# Altium PCB BoostconverterLast.PcbDoc
Units mm, origin at the board's own origin, x right, y up, seen from the top; angles counter-clockwise.
Board outline 25.4 x 57.15 mm, 2 copper layers (Top Layer, Bottom Layer); 33 components, 21 nets, 100 pads, 32 vias.
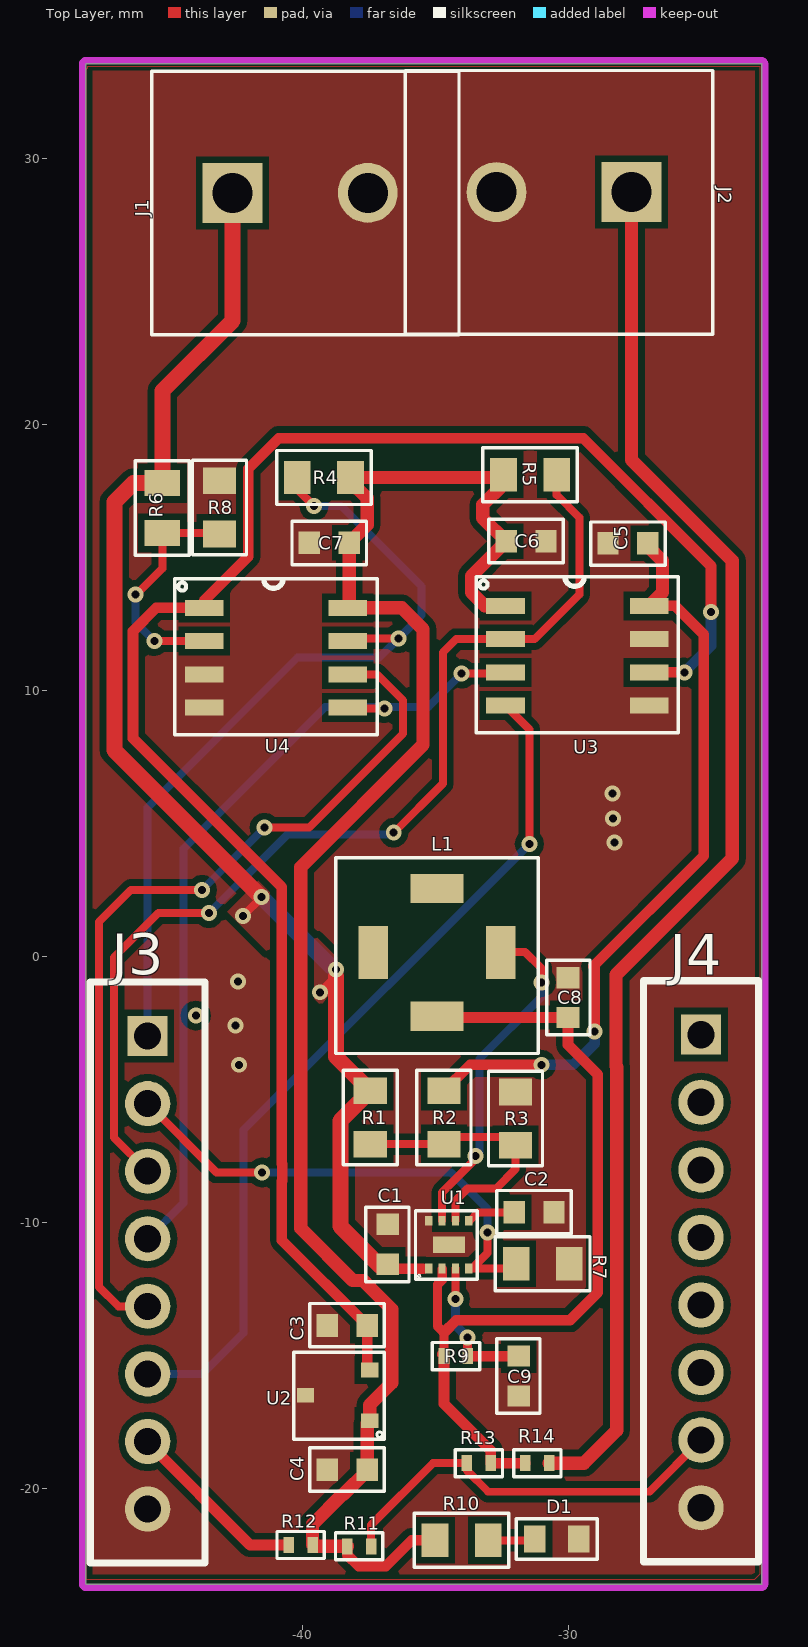
[diagram p0: Top Layer view]
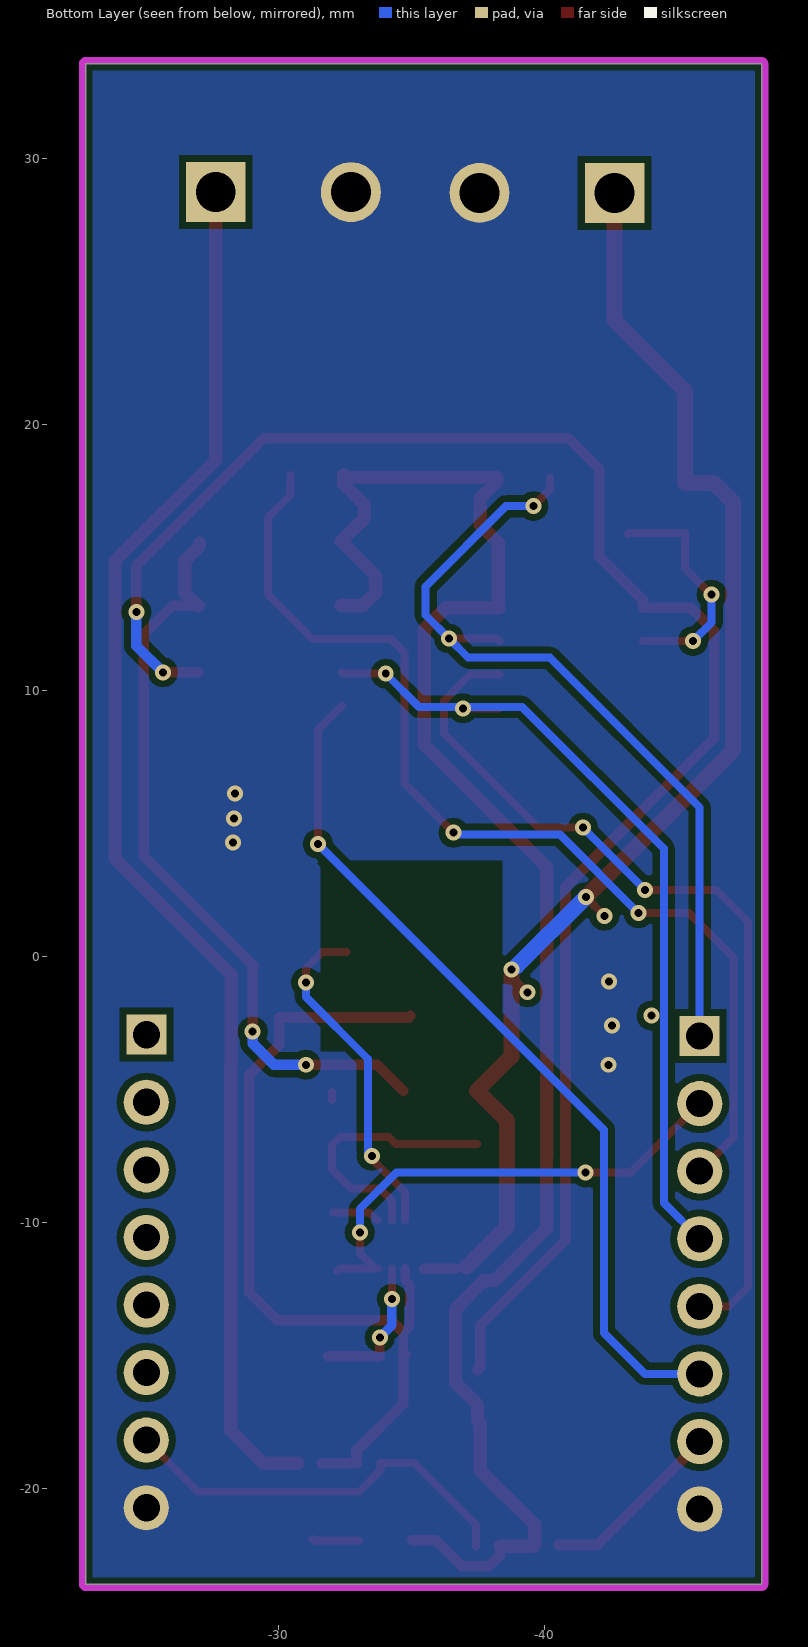
[diagram p1: Bottom Layer view, seen from below]
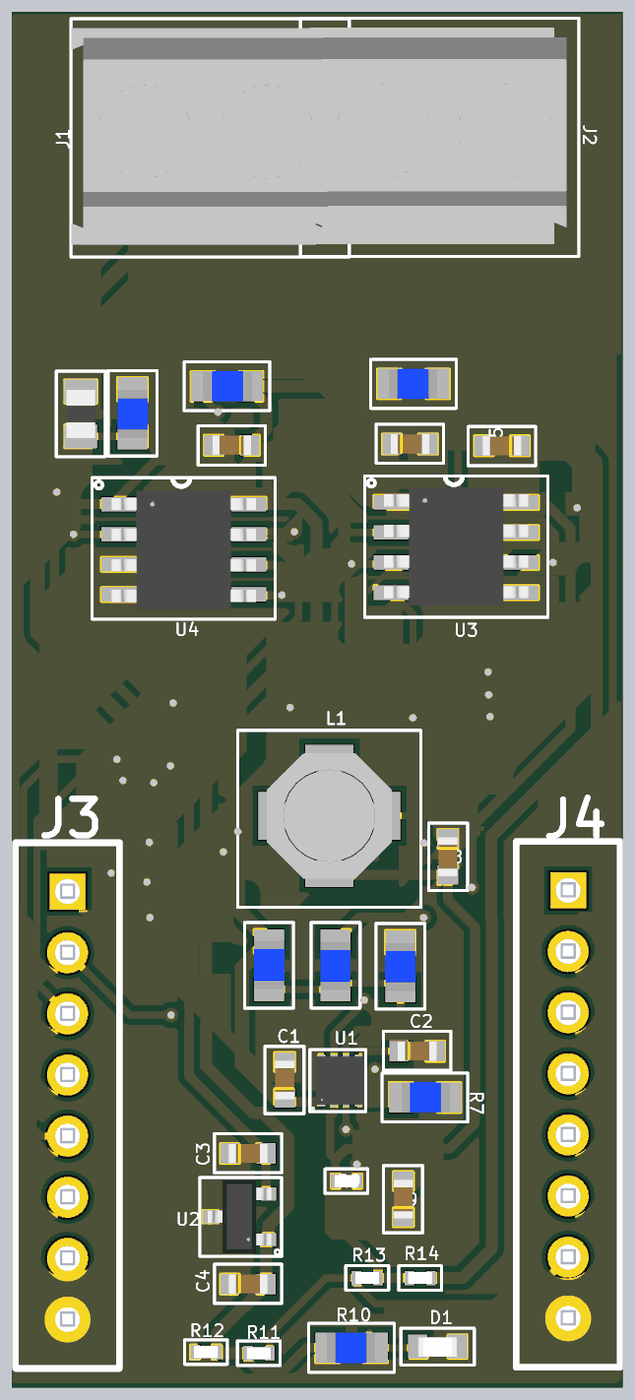
[diagram p2: 3D render of the assembled board from above, using the file's embedded part models]

## Layer stack, top to bottom
Top Solder: solder mask 0.0102, Solder Resist, Dk 3.5
Top Layer: signal copper 0.0356
Dielectric 1: dielectric 0.32, FR-4, Dk 4.8
Bottom Layer: signal copper 0.0356
Bottom Solder: solder mask 0.0102, Solder Resist, Dk 3.5

## Board outline
-48.15,-23.6 -22.75,-23.6 -22.75,33.55 -48.15,33.55

## Design rules (kind name [scope] priority, off if disabled: settings)
Clearance Clearance_1 [All] p1: gap=0.254 ignorepadtopadclearanceinfootprint=FALSE
Clearance [All] p2: gap=0.254 ignorepadtopadclearanceinfootprint=FALSE
PolygonConnect [All] p1: connectstyle=Direct reliefconductorwidth=0.254 reliefentries=4 polygonreliefangle="90 Angle" airgapwidth=0.254
RoutingVias [All] p1: holewidth=0.711 width=1.27 viastyle="Through Hole" minholewidth=0.711 minwidth=1.27 maxholewidth=0.711 maxwidth=1.27
SolderMaskExpansion [All] p1: expansion=0.102
Width [All] p1: maxlimit=1 minlimit=0.3 preferedwidth=0.3 minimp=50.000000 maximp=50.000000 favimp=50.000000
30 further rules are at their usual default settings.

## Components (designator, comment, footprint, x,y, rotation, side; value= is the part's Value field where it differs from the comment)
C1 "ANCAP110040340E0000" C0603-N -36.8,-10.825 r0 top value="1 µF"
C2 "ANCAP0UF1006030412" C0603-N -31.3,-9.625 r270 top value="0.1 µF"
C3 "ANCAP110040340E0000" C0603-N -38.325,-13.875 r270 top value="1 µF"
C4 "ANCAP110040340E0000" C0603-N -38.325,-19.3 r270 top value="1 µF"
C5 "ANCAP0UF1006030412" C0603-N -27.775,15.525 r90 top value="0.1 µF"
C6 "ANCAP0UF1006030412" C0603-N -31.6,15.6 r270 top value="0.1 µF"
C7 "ANCAP0UF1006030412" C0603-N -39,15.55 r90 top value="0.1 µF"
C8 "ANCAP110040340E0000" C0603-N -30.025,-1.55 r180 top value="1 µF"
C9 "ANCAP0UF1006030412" C0603-N -31.875,-15.775 r0 top value="0.1 µF"
D1 "ANLEDQTLP601C4TR00" QTLP601C4TR-0603 -30.45,-21.9 r0 top value="Green LED"
J1 "ANCON02202P1757242" 796911-2 -40.09,28.7 r0 top value="2POS 90DEG 5.08MM"
J2 "ANCON02202P1757242" 796911-2 -30.175,28.725 r180 top value="2POS 90DEG 5.08MM"
J3 "ANCON2000824000000" 8POS -45.825,-11.885 r270 top value="Header 5x1"
J4 "ANCON2000824000000" 8POS -25.025,-11.835 r270 top value="Header 5x1"
L1 "ANIND10UH001A40009" SRU5028 -34.949,0.15 r180 top value="10uH 1.40A"
R1 "ANRES10K006031T700" 0603-N -37.455,-6.058 r90 top value=10k
R2 "ANRES1K0006033BC00" 0603-N -34.688,-6.058 r270 top value=1k
R3 "ANRES1K0006033BC00" 0603-N -31.997,-6.098 r270 top value=1k
R4 "ANRES10K006031T700" 0603-N -39.2,18 r0 top value=10k
R5 "ANRES10K006031T700" 0603-N -31.45,18.1 r180 top value=10k
R6 "ANRESE240215030000" 0805-N -45.275,16.85 r90 top value=15k
R7 "ANRES10K006031T700" 0603-N -30.975,-11.55 r0 top value=10k
R8 "ANRESE240147010000" 0603-N -43.125,16.875 r270 top value="470 ohm"
R9 "ANRESE240000000000" 0402-N -34.238,-15.025 r0 top value="0 ohm"
R10 "ANRES1K0006033BC00" 0603-N -34.025,-21.95 r180 top value=1k
R11 "ANRESE240000000000" 0402-N -37.875,-22.175 r180 top value="0 ohm"
R12 "ANRESE240000000000" 0402-N -40.075,-22.125 r180 top value="0 ohm"
R13 "ANRESE240000000000" 0402-N -33.375,-19.05 r0 top value="0 ohm"
R14 "ANRESE240000000000" 0402-N -31.175,-19.05 r0 top value="0 ohm"
U1 "ANICMIC2606YMLTR00" MIC2606YML-TR -34.506,-10.837 r90 top
U2 "ANICMAX6106EURTTRN" MAX6106EUR+T -38.683,-16.5 r180 top
U3 "ANICMCP4921EMCND00" MCP4921T-E/SN -29.675,11.3 r0 top
U4 "ANICMCP3551ESNND00" MCP3551-E/SN -41,11.225 r0 top

## Footprints (in the part's own frame and the unit in brackets; to place one, negate y for a bottom-side part, rotate by r counter-clockwise, add the part's x,y. Pads: shape width x height; smd on the part's side, far side on the other; paste and mask are expansions set on the pad)
8POS [mm]
  rect 1.5x1.5 hole 1.02: 1(-8.89,0)
  round 1.7 hole 1.02: 2(-6.35,0) 3(-3.81,0) 4(-1.27,0) 5(1.27,0) 6(3.81,0) 7(6.35,0) 8(8.89,0)
  silkscreen extent -10.92,-2.16 10.92,2.16, body extent -10.19,-1.25 10.14,1.25, height 2.65
0402-N [mm]
  rect 0.4x0.6 smd mask+0.05: 1(-0.45,0) 2(0.45,0)
  silkscreen extent -0.89,-0.51 0.89,0.51, body extent -0.5,-0.25 0.5,0.25, height 0.36
0603-N [mm]
  rect 1x1.25 smd mask+0.05: 1(-1,0) 2(1,0)
  silkscreen extent -1.78,-1.02 1.78,1.02, body extent -0.97,-0.63 1.02,0.63, height 0.5
0805-N [mm]
  rect 0.98x1.35 smd mask+0.05: 1(-0.935,0) 2(0.935,0)
  silkscreen extent -1.78,-1.02 1.78,1.02, body extent -1,-0.6 1,0.6, height 0.71
796911-2 [mm]
  rect 2.25x2.25 hole 1.5 mask+0.05: 1(-2.54,0)
  round 2.25 hole 1.5 mask+0.05: 2(2.54,0)
  silkscreen extent -5.59,-5.33 5.97,4.57, body extent -5.58,-7.49 5.08,4.17, height 13.51
C0603-N [mm]
  rect 0.85x0.8 smd mask+0.05: 1(0,0.75) 2(0,-0.75)
  silkscreen extent -0.82,-1.4 0.8,1.4, body extent -0.4,-0.8 0.4,0.8, height 0.9
MAX6106EUR+T [mm]
  rect 0.65x0.55 smd mask+0.05: 1(-1.207,0.95) 2(-1.207,-0.95) 3(1.208,0)
  silkscreen extent -1.75,-1.63 1.65,1.65, body extent -1.32,-1.52 1.32,1.52, height 1.12
MCP3551-E/SN [mm]
  rect 1.45x0.6 smd mask+0.05: 1(-2.7,1.875) 2(-2.7,0.625) 3(-2.7,-0.625) 4(-2.7,-1.875) 5(2.7,-1.875) 6(2.7,-0.625) 7(2.7,0.625) 8(2.7,1.875)
  silkscreen extent -3.8,-2.9 3.8,2.98, body extent -3,-2.48 3,2.43, height 1.86
MCP4921T-E/SN [mm]
  rect 1.45x0.6 smd mask+0.05: 1(-2.7,1.875) 2(-2.7,0.625) 3(-2.7,-0.625) 4(-2.7,-1.875) 5(2.7,-1.875) 6(2.7,-0.625) 7(2.7,0.625) 8(2.7,1.875)
  silkscreen extent -3.8,-2.9 3.8,2.98, body extent -3,-2.4 3,2.5, height 1.76
MIC2606YML-TR [mm]
  rect 0.37x0.27 smd mask+0.05: 1(-0.9,0.75) 2(-0.9,0.25) 3(-0.9,-0.25) 4(-0.9,-0.75) 5(0.9,-0.75) 6(0.9,-0.25) 7(0.9,0.25) 8(0.9,0.75)
  rect 0.62x1.2 smd mask+0.05: 9(0,0)
  silkscreen extent -1.3,-1.08 1.28,1.25, body extent -1,-1 1,1.25, height 1.76
QTLP601C4TR-0603 [mm]
  rect 0.8x1 smd mask+0.05: 1(-0.825,0) 2(0.825,0)
  silkscreen extent -1.52,-0.76 1.52,0.76, body extent -0.8,-0.42 0.8,0.38, height 0.61
SRU5028 [mm] "Ýnductor"
  rect 1.1x2 smd mask+0.05: 1(-2.4,0) 4(2.4,0)
  rect 2x1.1 smd mask+0.05: 2(0,2.4)
  rect 2x1.1 smd paste+0 mask+0.05: 3(0,-2.4)
  silkscreen extent -3.8,-3.56 3.8,3.8, body extent -2.6,-2.6 2.6,2.6, height 2.81

## Part data
C1 C3 C4 C8: library part CL10A105KP8NNNC, "CAP CER 1UF 10V X5R 0603", Digi-Key Part Number=1276-1182-2-ND, Manufacturer="Samsung Electro-Mechanics", Operating Temperature="-55°C ~ 85°C", Voltage=10V, Order Number=CL10A105KP8NNNC
C2: library part 0603YC104JAT2A, "0.10µF ±5% 16V Ceramic Capacitor X7R 0603 (1608 Metric)", Digi-Key Part Number=478-3726-2-ND, Manufacturer="KYOCERA AVX", Operating Temperature="-55°C ~ 125°C", Voltage - Rated=16V, Order Number=0603YC104JAT2A
C5 C6 C7 C9: library part 0603YC104JAT2A, "0.10µF ±5% 16V Ceramic Capacitor X7R 0603 (1608 Metric)", Digi-Key Part Number=478-3726-2-ND, Manufacturer="KYOCERA AVX", Operating Temperature="-55°C ~ 125°C", Voltage=16V, Order Number=0603YC104JAT2A
D1: library part QTLP601C4TR, "Green 570nm LED Indication - Discrete 2.1V 0603 (1608 Metric)", Current - Test="20 mA", Digi-Key Part Number=1080-1405-2-ND, Manufacturer="Everlight Electronics Co Ltd", Voltage - Forward (Vf) (Typ)="2.1 V"
J1 J2: library part 796911-2, "TERM BLK 2P SIDE ENT 5.08MM PCB", Current="17.5 A", Digi-Key Part Number=A121381-ND, Manufacturer="Phoenix Contact", Voltage="300 V", Name="Header 2x1"
J3 J4: library part PH1-08-UA, "8 POS HEADER", Current Rating="3 A", Digi-Key Part Number=2057-PH1-08-UA-ND, Manufacturer="Adam Tech", Voltage Rating=250V
L1: library part SRU5028-100Y, "10uH, 1.40A, -40C +125C, SRU5028-100Y", Current Rating="1.8 A", Digi-Key Part Number=SRU5028-100YTR-ND, Manufacturer="Bourns Inc.", Operating Temperature="-40°C ~ 125°C"
R1 R5: library part RC0603FR-0710KL, "10K 1/10W 5% 0603", Digi-Key Part Number=311-10.0KHRTR-ND, Manufacturer=YAGEO, Operating Temperature="-55°C ~ 155°C", Detailed Description="10 kOhms ±1% 0.1W, 1/10W Chip Resistor 0603 (1608 Metric) Moisture Resistant Thick Film"
R2 R3 R10: library part CRCW06031K00FKEAHP, "RES SMD 1K OHM 1% 1/3W 0603", Digi-Key Part Number=541-1.00KSTR-ND, Manufacturer="Vishay Dale", Operating Temperature="-55°C ~ 155°C", Detailed Description="1 kOhms ±1% 0.333W, 1/3W Chip Resistor 0603 (1608 Metric) Automotive AEC-Q200, Pulse Withstanding Thick Film"
R4 R7: library part RC0603FR-0710KL, "10K 1/10W 5% 0603", Digi-Key Part Number=311-10.0KHRTR-ND, Manufecturer=YAGEO, Operating Temperature="-55°C ~ 155°C", Detailed Description="10 kOhms ±1% 0.1W, 1/10W Chip Resistor 0603 (1608 Metric) Moisture Resistant Thick Film"
R6: library part ERJ-6ENF1502V, "E24, 15K, 0805, %1", Digi-Key Part Number=P15.0KCTR-ND, Manufacturer="Panasonic - ECG", Operating Temperature="-55°C ~ 155°C", Detailed Description="15 kOhms ±1% 0.125W, 1/8W Chip Resistor 0805 (2012 Metric) Automotive AEC-Q200 Thick Film"
R8: library part ERJ-3EKF4700V, "E24, 470R, 0603, %1", Digi-Key Part Number=P470HTR-ND, Manufacturer="Panasonic Electronic Components", Operating Temperature="-55°C ~ 155°C", Detailed Description="470 Ohms ±1% 0.1W, 1/10W Chip Resistor 0603 (1608 Metric) Automotive AEC-Q200 Thick Film", Manufecturer Product Number=ERJ-3EKF4700V
R9 R11 R13 R14: library part 6-1622826-4, "0R, 0402, Thick Film, 1/16W, %1", Digi-Key Part Number=A106025TR-ND, Manufacturer="TE Connectivity Passive Product", Manufecturer Part Number=CRG0402ZR, Operating Temperature="-55°C ~ 155°C", Detailed Description="0 Ohms Jumper 0.063W, 1/16W Chip Resistor 0402 (1005 Metric) Thick Film"
R12: library part 6-1622826-4, "0R, 0402, Thick Film, 1/16W, %1", Digi-Key Part Number=A106025TR-ND, Manufecturer="TE Connectivity Passive Product", Manufecturer Part Number=CRG0402ZR, Operating Temperature="-55°C ~ 155°C", Detailed Description="0 Ohms Jumper 0.063W, 1/16W Chip Resistor 0402 (1005 Metric) Thick Film"
U1: library part MIC2606YML-TR, "IC REG BOOST ADJ 500MA 8MLF", Current - Output="500mA (Switch)", Manufacturer="Microchip Technology", Operating Temperature="-40°C ~ 125°C (TJ)", Voltage - Output (Min/Fixed)=4.5V, Name=MIC2606
U2: library part MAX6106EUR+T, "IC VREF SERIES 0.4% SOT23-3", Current - Output=5mA, Manufacturer="Analog Devices Inc./Maxim Integrated", Operating Temperature="-40°C ~ 85°C (TA)", Voltage - Output (Min/Fixed)=2.048V, Name=MAX6106
U3: library part MCP4921T-E/SN, "IC DAC 12BIT V-OUT 8DFN", Digi-Key Part Number=MCP4921T-E/SNTR-ND, Manufacturer="Microchip Technology", Operating Temperature="-40°C ~ 125°C", Voltage - Supply, Analog/Digital="2.7V ~ 5.5V", Input Type=Differential, Name=MCP4921, Number of Bits=12
U4: library part MCP3551-E/SN, "IC ADC 22BIT SIGMA-DELTA 8SOIC", Manufacturer="Microchip Technology", Operating Temperature="-40°C ~ 125°C", Voltage - Supply, Analog/Digital="2.7V ~ 5.5V", Input Type=Differential, Name=MCP3551

## Via types
v1: diameter 0.6, hole 0.3, Top Layer to Bottom Layer, 32 vias

## Nets (pads, with @x,y where several pads share a name; then routed paths per layer and width w, separated by ;. In a path a pad name is that pad's centre, name@x,y a point inside that pad or via, vN(x,y) a via of type N, cw(c..) or ccw(c..) an arc to the next point about the centre after c; other vN are vias at no path point)
CS1: J3.3 R5.1 U3.2 | length 39.5
  Top Layer w0.3: J3.3 -47.096,-6.804 -47.096,-0.046 -45.425,1.625 -43.526,1.625 v1(-43.525,1.623) v1@-43.498,1.623 ; v1(-36.575,4.65) -34.725,6.5 -34.725,10.329 -34.729,10.333 -34.729,11.421 -34.225,11.925 U3.2 -31.275,11.925 -29.6,13.6 -29.6,16.5 -30.45,17.35 R5.1
  Bottom Layer w0.3: v1(-43.525,1.623) -40.573,4.575 -36.65,4.575 v1(-36.575,4.65)
CS2: J3.1 R4.1 U4.7 | length 31.5
  Top Layer w0.3: R4.1 -40.2,17.55 v1(-39.575,16.925) ; U4.7 -38.2,11.95 v1(-36.4,11.95)
  Bottom Layer w0.3: J3.1 -45.825,5.6 -40.2,11.225 -37.125,11.225 v1(-36.4,11.95) -35.525,12.825 -35.525,13.9 -38.55,16.925 v1(-39.575,16.925)
EN: J3.2 R7.1 U1.4 | length 18.5
  Top Layer w0.3: J3.2 -43.235,-8.125 v1(-41.525,-8.125) ; U1.4 U1.4@-33.637,-11.737 ; v1(-33.05,-10.375) -33.05,-11.15 U1.4@-33.637,-11.737 ; R7.1@-32.2,-11.825 -32.288,-11.737 U1.4@-33.637,-11.737
  Bottom Layer w0.3: v1(-41.525,-8.125) -34.425,-8.125 -33.05,-9.5 v1(-33.05,-10.375)
GND: C1.1 C2.1 C3.2 C4.2 C5.1 C6.1 C7.1 C8.2 C9.2 D1.2 J1.2 J2.2 J3.8 J4.8 R3.1 R7.2 R8.1 U1.8 U1.9 U2.3 U3.5 U3.7 U4.3 U4.4 | length 0.3
  Top Layer w0.3: J2.2@-32.005,28.7 J2.2@-31.98,28.725 ; R3.1@-31.997,-5.402 R3.1
  other v1: -42.4,-4.075 -42.525,-2.6 -42.425,-0.95 -28.275,4.275 -28.325,5.175 -28.35,6.125
MISO: J3.5 U4.6 | length 33.9
  Top Layer w0.3: J3.5 -46.92,-13.155 -47.65,-12.425 -47.65,1.3 -46.45,2.5 v1(-43.775,2.5) ; v1(-41.438,4.838) -39.762,4.838 -36.221,8.379 -36.221,9.621 -37.2,10.6 U4.6
  Bottom Layer w0.3: v1(-43.775,2.5) v1(-41.438,4.838)
MOSI: J3.6 U3.4 | length 32.6
  Top Layer w0.3: U3.4 -31.475,8.525 v1(-31.475,4.225)
  Bottom Layer w0.3: J3.6 -43.77,-15.695 -42.229,-14.154 -42.229,-6.529 v1(-31.475,4.225)
NetD1_1: D1.1 R10.1 | length 1.8
  Top Layer w0.3: R10.1 -31.325,-21.95 D1.1
NetL1_1: L1.1 U1.7 | length 12.8
  Top Layer w0.3: U1.7 -34.756,-8.875 -33.499,-7.619 v1(-33.499,-7.502) ; L1.1@-32.542,0.162 -31.637,0.162 -31.025,-0.45 v1(-31.025,-0.975)
  Bottom Layer w0.3: v1(-33.499,-7.502) -33.35,-7.353 -33.35,-3.85 -31.025,-1.525 v1(-31.025,-0.975)
NetR1_1: R1.1 R2.2 R3.2 U1.6 | length 10.1
  Top Layer w0.3: R1.1 R2.2 -34.404,-7.058 -34.142,-6.796 -32.299,-6.796 R3.2 -31.997,-7.997 -32.725,-8.725 -33.8,-8.725 -34.256,-9.181 U1.6
NetR6_1: R6.1 R8.2 U4.2 | length 8.8
  Top Layer w0.3: v1(-46.275,13.6) -46.25,13.6 -45.275,14.575 R6.1 -43.165,15.915 R8.2 ; v1(-45.575,11.85) U4.2
  Bottom Layer w0.3: v1(-46.275,13.6) -46.275,12.55 v1(-45.575,11.85)
SCK: J3.4 U3.3 U4.5 | length 31.5
  Top Layer w0.3: U4.5 -38.275,9.325 v1(-36.925,9.325) ; v1(-34.025,10.625) -32.425,10.625 U3.3
  Bottom Layer w0.3: J3.4 -44.479,-9.269 -44.479,4.046 -39.15,9.375 -36.975,9.375 v1(-36.925,9.325) -36.875,9.375 -35.275,9.375 v1(-34.025,10.625)
SS: C2.2 U1.5 | length 1.8
  Top Layer w0.3: U1.5@-33.717,-9.937 -33.405,-9.625 C2.2
VCC: C4.1 C6.2 C7.2 R4.2 R5.2 R10.2 R11.2 R12.1 U2.1 U3.1 U4.8 | length 66.3
  Top Layer w0.4: R11.2 -38.325,-22.5 -37.896,-22.929 -36.879,-22.929 -35.9,-21.95 R10.2
  Top Layer w0.5: R11.2 -39.575,-22.175 R12.1 -39.625,-21.35 -38.504,-20.229 -38.466,-20.229 -37.575,-19.338 C4.1 -37.575,-17.55 U2.1 -37.475,-16.863 -36.646,-16.034 -36.646,-13.266 -37.433,-12.479 -37.729,-12.184 -38.116,-12.184 -40.075,-10.225 -40.075,-8.737 -40.067,-8.729 -40.067,-7.521 -40.075,-7.513 -40.075,3.35 -35.475,7.95 -35.475,12.3 -36.275,13.1 U4.8 -38.25,13.15 C7.2 -37.575,16.225 -37.575,17.22 -38.2,17.845 R4.2 -32.55,18 R5.2 -32.45,17.75 -33.225,16.975 -33.225,16.475 C6.2 -33.65,14.3 -33.65,13.675 -33.15,13.175 U3.1 U3.1@-32.35,13.2
VCC-3.3V: J3.7 R12.2 | length 6.9
  Top Layer w0.4: J3.7 -45.825,-18.275 -41.975,-22.125 R12.2
VCC-5V: J4.7 R11.1 R13.1 | length 15.6
  Top Layer w0.3: R11.1 -37.425,-21.375 -35.1,-19.05 R13.1 -33.825,-19.325 -33.025,-20.125 -26.965,-20.125 J4.7
VCC-EXT: J2.1 R14.2 | length 53
  Top Layer w0.5: R14.2 -29.425,-19.05 -28.196,-17.821 -28.196,-4.158 -28.22,-4.134 -28.22,-0.695 -23.846,3.679 -23.846,14.867 -27.635,18.656 J2.1
VDAC: C5.2 R2.1 U3.8 | length 28.8
  Top Layer w0.4: R2.1 -33.705,-4.075 v1(-31.025,-4.075) ; v1(-29.024,-2.827) -29.024,-0.426 -29.075,-0.375 -24.925,3.775 -24.925,12.1 -26,13.175 U3.8
  Top Layer w0.5: C5.2 -27.025,15.425 -26.475,14.875 -26.475,13.675 U3.8
  Bottom Layer w0.4: v1(-31.025,-4.075) -29.825,-4.075 -29.024,-3.274 v1(-29.024,-2.827)
VDD: C9.1 R9.2 U1.3 | length 5.4
  Top Layer w0.3: v1(-34.256,-12.875) U1.3
  Top Layer w0.35: v1(-33.8,-14.325) -33.8,-15.013 R9.2
  Top Layer w0.4: R9.2 C9.1
  Bottom Layer w0.35: v1(-34.256,-12.875) -34.256,-13.869 v1(-33.8,-14.325)
VIN: C8.1 L1.2 R9.1 R13.2 R14.1 U1.2 | length 31.8
  Top Layer w0.35: U1.2 -34.756,-12.164 -34.927,-12.335 -34.927,-13.899 -34.688,-14.138 R9.1
  Top Layer w0.4: L1.2@-34.942,-2.238 -34.88,-2.3 C8.1 -30.025,-3.325 -28.9,-4.45 -28.9,-12.625 -29.95,-13.675 -34.225,-13.675 -34.688,-14.138 ; R9.1@-34.756,-14.957 R9.1 -34.688,-16.812 -32.925,-18.575 R13.2 R14.1
VOUT: C1.2 J1.1 R1.2 R6.2 U1.1 | length 50.7
  Top Layer w0.3: v1(-42.242,1.525) -41.55,2.217 v1(-41.55,2.225) ; v1(-39.35,-1.35) -38.75,-0.75 v1(-38.75,-0.5)
  Top Layer w0.4: C1.2@-36.638,-11.737 -35.475,-11.737
  Top Layer w0.6: J1.1 -42.63,23.895 -45.275,21.25 R6.2 -46.365,17.785 -47.079,17.071 -47.079,7.754 v1(-41.55,2.225) ; v1@-38.75,-0.75 -38.75,-3.763 R1.2 -38.584,-6.187 -38.584,-10.141 C1.2@-37.063,-11.662
  Bottom Layer w0.5: v1(-41.55,2.225) v1@-41.538,2.225 ; v1@-38.937,-0.388 v1@-38.937,-0.375
  Bottom Layer w0.6: v1@-41.538,2.225 v1@-38.937,-0.375
VREF: C3.1 U2.2 U3.6 U4.1 | length 66
  Top Layer w0.4: U2.2 -37.575,-15.45 C3.1 -40.779,-10.671 -40.779,-8.445 -40.771,-8.437 -40.771,-7.813 -40.779,-7.805 -40.779,2.604 -46.375,8.2 -46.375,12.225 -45.5,13.1 U4.1 -43.7,13.375 -42.046,15.029 -42.046,18.329 -40.9,19.475 -29.45,19.475 -24.65,14.675 v1(-24.65,12.95) ; U3.6 v1(-25.65,10.675)
  Bottom Layer w0.4: v1(-25.65,10.675) -24.65,11.675 v1(-24.65,12.95)
pads on no net: J4.1 J4.2 J4.3 J4.4 J4.5 J4.6 L1.3 L1.4
copper on no net:
  other v1: -44.016,-2.225

## Polygon pours and split planes (outlines as drawn)
GND on Top Layer (solid, remove dead copper, pour order 62): -48.075,33.45 -22.825,33.45 -22.825,-23.525 -23.125,-23.225 -48.15,-23.225 -48.15,33.35 -48.075,33.425
VOUT on Top Layer "vout" (solid, remove dead copper, pour order 50): -41.6,2.913 -38.316,-0.449 -39.298,-1.852 -42.832,1.682
GND on Top Layer "Top Layer-No Net 1" (solid, remove dead copper, shelved, pour order 36): -48.075,33.45 -22.825,33.45 -22.825,-23.225 -23.025,-23.425 -48.125,-23.425 -48.125,33.35 -48.075,33.4
no net on Top Layer "Top Layer-No Net 2" (solid, remove dead copper, shelved, pour order 14): -43.9,22.55
no net on Top Layer "Top Layer-No Net" (solid, remove dead copper, shelved, pour order 4): -13.7,-5.225
GND on Bottom Layer "Bottom Layer-GND" (solid, remove dead copper, pour order 46): -48.05,33.425 -22.875,33.425 -22.875,-23.4 -22.825,-23.45 -22.975,-23.6 -48.15,-23.6 -48.15,33.325 -48.05,33.425
no net on Bottom Layer "Bottom Layer-No Net" (solid, remove dead copper, shelved, pour order 28): -48.05,33.425

## Keep-outs
Keep-Out Layer:
  lines w0.254: -48.277,-23.6 ccw(c-48.15,-23.6) -48.15,-23.727 ; -48.277,-23.6 ccw(c-48.15,-23.6) -48.15,-23.727 ; -48.277,-23.6 -48.277,33.55 ; -48.277,33.55 cw(c-48.15,33.55) -48.15,33.677 ; -48.277,33.55 cw(c-48.15,33.55) -48.15,33.677 ; -48.15,-23.727 -22.75,-23.727 ; -48.15,33.677 -22.75,33.677 ; -22.75,-23.727 ccw(c-22.75,-23.6) -22.623,-23.6 ; -22.75,-23.727 ccw(c-22.75,-23.6) -22.623,-23.6 ; -22.75,33.677 cw(c-22.75,33.55) -22.623,33.55 ; -22.75,33.677 cw(c-22.75,33.55) -22.623,33.55 ; -22.623,-23.6 -22.623,33.55

## Other copper
Top Layer:
  pour cut-out: -38.7,3.65 -38.7,-3.65 -31.154,-3.65 -31.118,-3.614 -31.118,3.725
Bottom Layer:
  pour cut-out: -36.501,2.6
  pour cut-out: -38.4,3.6 -31.55,3.6 -31.45,3.5 -31.575,3.375 -31.575,-3.575 -38.2,-3.575 -38.4,-3.375